# Altium PCB 最小系统板第二版.PcbDoc
Units mil, origin at the board's own origin, x right, y up, seen from the top; angles counter-clockwise.
Board outline 2086.61 x 984.25 mil, 2 copper layers (Top Layer, Bottom Layer); 32 components, 50 nets, 160 pads, 42 vias.
Unrouted connection lines stored in the file: 32.
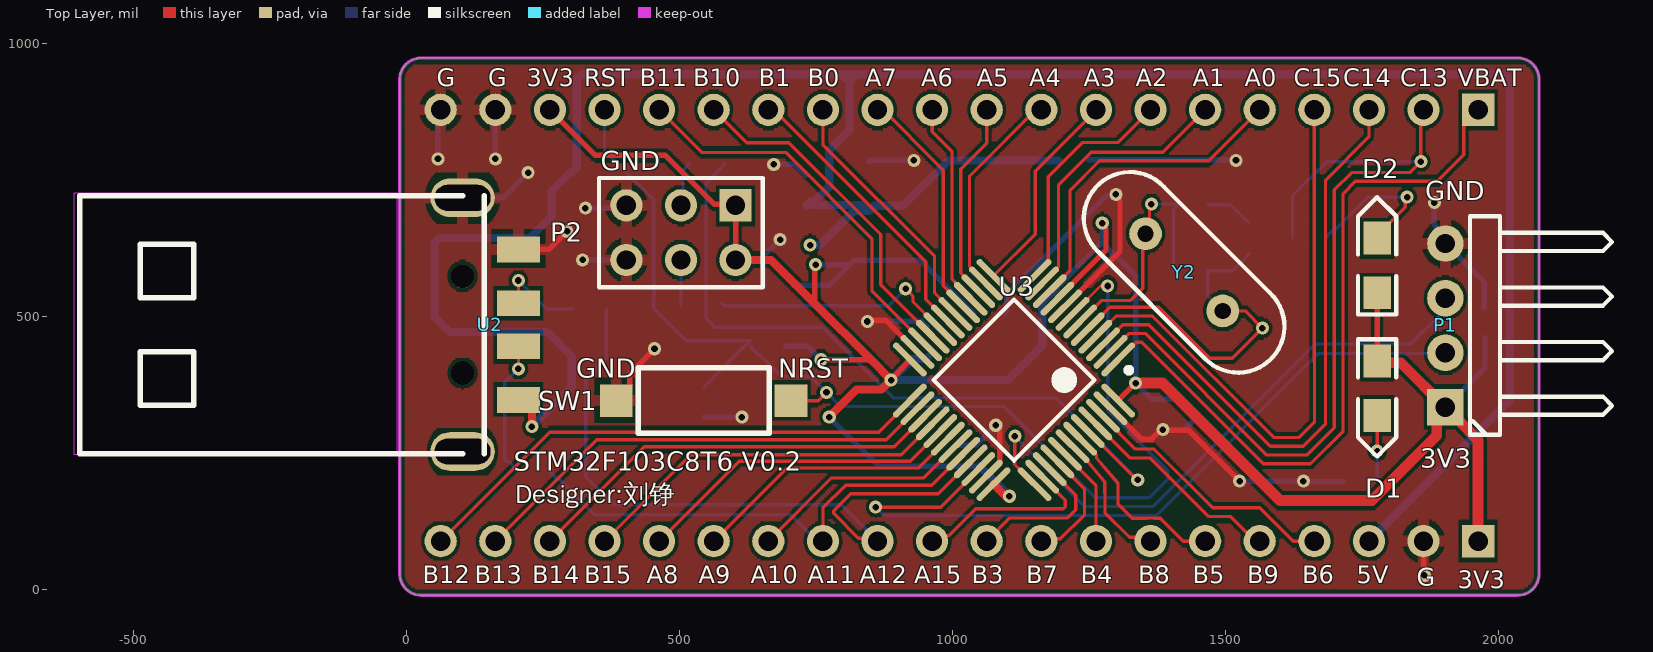
[diagram p0: Top Layer view]
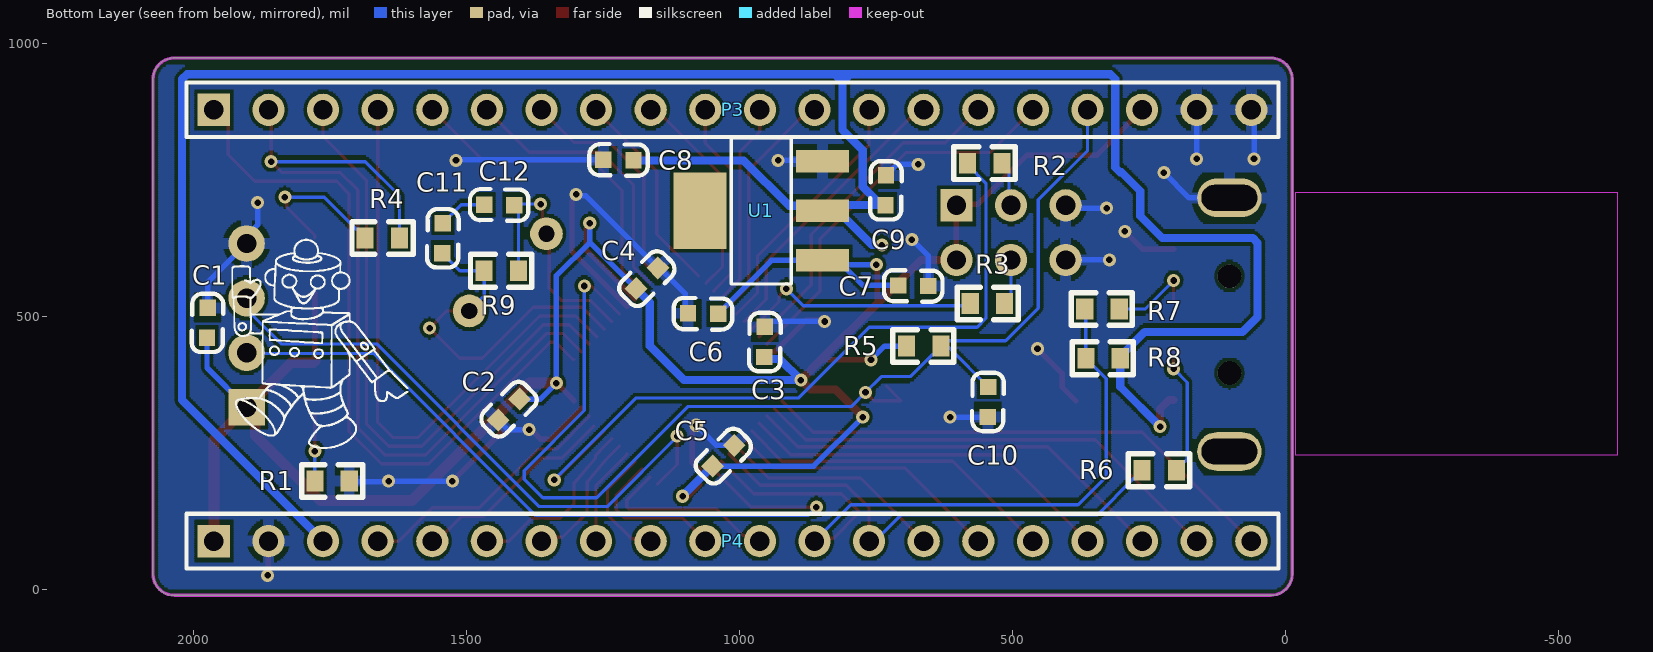
[diagram p1: Bottom Layer view, seen from below]

## Layer stack, top to bottom
Top Solder: solder mask 0.4, Solder Resist, Dk 3.5
Top Layer: signal copper 1.4
Dielectric 1: dielectric 12.6, FR-4, Dk 4.8
Bottom Layer: signal copper 1.4
Bottom Solder: solder mask 0.4, Solder Resist, Dk 3.5

## Board outline
-11.53,27.84 -11.53,933.35 cw(c27.84,933.35) 27.84,972.72 2035.71,972.72 cw(c2035.71,933.35) 2075.08,933.35 2075.08,27.84 cw(c2035.71,27.84) 2035.71,-11.53 27.84,-11.53 cw(c27.84,27.84)

## Design rules (kind name [scope] priority, off if disabled: settings)
Clearance [All] p1: gap=6 ignorepadtopadclearanceinfootprint=TRUE
PolygonConnect [All] p1: thpad.connectstyle=Relief thpad.reliefconductorwidth=20 thpad.reliefentries=4 thpad.polygonreliefangle="90 Angle" thpad.airgapwidth=10 smdpad.connectstyle=Relief smdpad.reliefconductorwidth=20 smdpad.reliefentries=4 smdpad.polygonreliefangle="90 Angle" smdpad.airgapwidth=10 via.connectstyle=Direct via.reliefconductorwidth=10 via.reliefentries=4 via.polygonreliefangle="90 Angle" via.airgapwidth=10
RoutingVias [All] p1: holewidth=28 width=50 viastyle="Through Hole" minholewidth=28 minwidth=50 maxholewidth=28 maxwidth=50
SolderMaskExpansion [All] p1: expansion=4 istentingtop=FALSE
Width Width_1 [InNetClass('New Class')] p1: maxlimit=20 minlimit=10 preferedwidth=15
Width [All] p2: maxlimit=6 minlimit=6 preferedwidth=6
30 further rules are at their usual default settings.

## Classes and differential pairs
net class "New Class": 5V GND VCC3V3
component class 最小系统板第二版: C1 C2 C3 C4 C5 C6 C8 C9 C10 C11 C12 D1 D2 m P1 P2 P3 P4 R1 R2 R3 R4 R5 R6 R7 R8 R9 SW1 U2 U3

## Components (designator, comment, footprint, x,y, rotation, side; value= is the part's Value field where it differs from the comment)
C1 "104,0603" 0603C 1976.35,459.79 r90 bottom
C2 "104,0603" 0603C 1403.07,347.62 r315 bottom
C3 "104,0603" 0603C 955.73,424.79 r90 bottom
C4 "104,0603" 0603C 1190.4,550.1 r135 bottom
C5 "104,0603" 0603C 1050.4,225.1 r135 bottom
C6 "104" 0603C 1095.21,505.35 r180 bottom
C7 "104" 0603C 710.21,556.35 r180 bottom
C8 "104" 0603C 1194.79,784.65 r0 bottom
C9 "104" 0603C 733.82,702.51 r90 bottom
C10 "105,0603" 0603C 544.65,370.21 r270 bottom
C11 "20p,0603" 0603C 1545.35,614.79 r90 bottom
C12 "20p,0603" 0603C 1413.32,702.37 r0 bottom
D1 "LED" LED-0805B 1778.47,417.72 r270 top
D2 "LED" LED-0805B 1778.47,542.72 r90 top
P1 "SWD" HDR2.54-WI-4P 1903.47,482.72 r90 top
P2 "Header 3X2" "Pin HDR2X3/2.54mm-S" 603.47,702.72 r180 top
P3 "Header20" "Pin HDR1X20/2.54mm-S" 1963.47,877.72 r180 bottom
P4 "Header20" "Pin HDR1X20/2.54mm-S" 1963.47,87.72 r180 bottom
R1 "510R,0603" 0603R 1715.48,197.72 r0 bottom
R2 "100K,0603" 0603R 582.99,780 r180 bottom
R3 "100K,0603" 0603R 515.25,523.06 r0 bottom
R4 "510R,0603" 0603R 1623.47,642.72 r0 bottom
R5 "10K" 0603R 695,445 r180 bottom
R6 "10K" 0603R 263.47,217.72 r180 bottom
R7 "10K" 0603R 368.47,512.72 r180 bottom
R8 "10K" 0603R 366.46,422.72 r180 bottom
R9 "1M" 0603R 1468.47,582.72 r180 bottom
SW1 "KEY" 复位开关 525,335 r180 top
U1 "AMS1117" SOT-223_L6.5-W3.5-P2.30-LS7.0-BR 960.97,692.72 r180 bottom
U2 "USB-mrico" "PCBComponent_1 - duplicate" 87.64,612.6 r270 top
U3 "STM32F103C8T6" LQFP-48_M 1113.47,382.72 r225 top
Y2 "8MHz" 直插外部晶振 1425,580 r135 top

## Footprints (in the part's own frame and the unit in brackets; to place one, negate y for a bottom-side part, rotate by r counter-clockwise, add the part's x,y. Pads: shape width x height; smd on the part's side, far side on the other; paste and mask are expansions set on the pad)
0603C [mil]
  rect 30x30 smd: 1(0.21,-0.35) 2(55.21,-1.35)
  silkscreen extent -26,-30 81,28, body extent -1,-15 62,16, height 12
0603R [mm]
  rect 0.8x0.965 smd: 1(0,0) 2(1.6,0)
  silkscreen extent -0.64,-0.76 2.21,0.76, body extent -0.04,-0.41 1.56,0.41, height 0.45
HDR2.54-WI-4P [mm] "弯脚排针，4脚"
  rect 1.7x1.7 hole 0.9: 1(-3.81,0)
  round 1.7 hole 0.9: 2(-1.27,0) 3(1.27,0) 4(3.81,0)
  silkscreen extent -5.08,-7.76 5.08,-1.14, body extent -5.08,-7.77 5.08,1.27, height 4.85
LED-0805B [mil]
  rect 60x50 smd: A(0,0) K(100,0)
  silkscreen extent -40,-35 175,35, body extent 10,-25 89,25, height 32
LQFP-48_M [mm] "Thin QFP, 48-Leads, Body 7x7mm, Pitch 0.5mm, IPC Low Density"
  oval 2.1x0.3 smd: 1(-4.1,2.75) 2(-4.1,2.25) 3(-4.1,1.75) 4(-4.1,1.25) 5(-4.1,0.75) 6(-4.1,0.25) 7(-4.1,-0.25) 8(-4.1,-0.75) 9(-4.1,-1.25) 10(-4.1,-1.75) 11(-4.1,-2.25) 12(-4.1,-2.75) 25(4.1,-2.75) 26(4.1,-2.25) 27(4.1,-1.75) 28(4.1,-1.25) 29(4.1,-0.75) 30(4.1,-0.25) 31(4.1,0.25) 32(4.1,0.75) 33(4.1,1.25) 34(4.1,1.75) 35(4.1,2.25) 36(4.1,2.75)
  oval 0.3x2.1 smd: 13(-2.75,-4.1) 14(-2.25,-4.1) 15(-1.75,-4.1) 16(-1.25,-4.1) 17(-0.75,-4.1) 18(-0.25,-4.1) 19(0.25,-4.1) 20(0.75,-4.1) 21(1.25,-4.1) 22(1.75,-4.1) 23(2.25,-4.1) 24(2.75,-4.1) 37(2.75,4.1) 38(2.25,4.1) 39(1.75,4.1) 40(1.25,4.1) 41(0.75,4.1) 42(0.25,4.1) 43(-0.25,4.1) 44(-0.75,4.1) 45(-1.25,4.1) 46(-1.75,4.1) 47(-2.25,4.1) 48(-2.75,4.1)
  silkscreen extent -4.22,-2.65 2.65,3.57, body extent -3.5,-3.5 3.5,3.5, height 1.6
"PCBComponent_1 - duplicate" [mm]
  rect 1.2x2 smd: 1(6.763,3.002) 2(4.263,3.002) 3(2.263,3.002) 4(-0.237,3.002)
  oval 1.8x3 hole 1.2 slot 2.6 at 90 deg: 5(-2.637,0.402) 6(9.163,0.402)
  round 1.1 hole 1.1 unplated: ""(1.013,0.402) ""(5.513,0.402)
  Keep-Out Layer board cut-out: -2.884,-2.667 9.308,-2.667 9.308,-17.653 -2.884,-17.653
  silkscreen extent -2.74,-17.4 9.26,1.4
"Pin HDR1X20/2.54mm-S" [mm]
  rect 1.5x1.5 hole 0.9: 1(0,0)
  round 1.5 hole 0.9: 2(2.54,0) 3(5.08,0) 4(7.62,0) 5(10.16,0) 6(12.7,0) 7(15.24,0) 8(17.78,0) 9(20.32,0) 10(22.86,0) 11(25.4,0) 12(27.94,0) 13(30.48,0) 14(33.02,0) 15(35.56,0) 16(38.1,0) 17(40.64,0) 18(43.18,0) 19(45.72,0) 20(48.26,0)
  silkscreen extent -1.27,-1.27 49.53,1.27, body extent -1.27,-1.27 49.53,1.27, height 7.58
"Pin HDR2X3/2.54mm-S" [mm] "Connector; Header; 3x2 Position"
  rect 1.5x1.5 hole 0.9: 1(0,0)
  round 1.5 hole 0.9: 2(0,2.54) 3(2.54,0) 4(2.54,2.54) 5(5.08,0) 6(5.08,2.54)
  silkscreen extent -1.27,-1.27 6.35,3.81, body extent -1.27,-1.27 6.35,3.81, height 7.58
SOT-223_L6.5-W3.5-P2.30-LS7.0-BR [mm]
  rect 2.465x1.05 smd: 1(2.857,-2.3) 2(2.857,0) 3(2.858,2.3)
  rect 2.465x3.54 smd: 4(-2.857,0)
  silkscreen extent -1.4,-3.4 1.4,3.4
复位开关 [mil]
  rect 60x60 smd: 1(-180,-10) 2(140,-10)
  silkscreen extent -140,-70 100,50
直插外部晶振 [mil]
  round 60 hole 30: 1(-100,0) 2(100,0)
  silkscreen extent -225,-85 225,85

## Part data
C1 C2 C3 C4 C5 C6 C7 C8 C9 C10 C11 C12: library part CAP, "电容"
D1 D2: "LED灯"
R1 R2 R3 R4 R5 R6 R7 R8 R9: library part RES, "电阻"
SW1: library part RST, "按键"
U1: library part "AMS1117 3V3"
U3: library part MCU
Y2: library part "Crystal oscillator", "晶振"

## Via types
v1: diameter 24, hole 12, Top Layer to Bottom Layer, tented both sides, 42 vias

## Nets (pads, with @x,y where several pads share a name; then routed paths per layer and width w, separated by ;. In a path a pad name is that pad's centre, name@x,y a point inside that pad or via, vN(x,y) a via of type N, cw(c..) or ccw(c..) an arc to the next point about the centre after c; other vN are vias at no path point)
5V: C8.1 C9.1 P4.3 R8.2 U1.2 U2.1 | length 4706.1
  Top Layer w15: U2.1 214.45,346.33 230.58,330.21 v1(230.58,297.54)
  Bottom Layer w15: v1(230.58,297.54) 303.47,370.43 303.47,425.97 258.73,470.71 79.29,470.71 51.87,498.13 51.87,634.09 60.66,642.88 226.54,642.88 266.83,683.17 266.83,729.19 300.91,763.27 303.85,763.27 312.64,772.05 312.64,933.93 321.43,942.72 802.2,942.72 2012.9,942.72 2021.69,933.93 2021.69,345.94 P4.3 ; C9.1 C9.1@740.97,710.22 ; v1(740,630) 757.89,630 820.61,692.72 U1.2 ; C9.1@740.97,703.45 747.99,703.45 837.74,703.45 U1.2 ; C9.1@747.99,710.22 775.21,737.44 775.21,803.96 812.1,840.85 812.1,932.82 ; U1.2@856.38,700.64 U1.2 ; U1.2@857.07,702.03 910.17,702.03 993.14,785 C8.1
BOOT0: R2.1 U3.44 | length 1340
  Top Layer w6: U3.44 1290.38,247.57 ; 1290.38,247.54 1337.92,200 v1(1340,200)
  Bottom Layer w6: R2.1 582.99,776.75 549.38,743.14 549.38,495.62 565.68,479.32 763.06,479.32 892.38,350 1190,350 v1(1340,200)
BOOT1: R3.2 U3.20 | length 437.7
  Top Layer w6: 925,540 928.44,536.56 928.44,525.99 U3.20
  Bottom Layer w6: R3.2 582.58,518.72 883.72,518.72 v1(915,550)
GND: C1.2 C2.2 C3.2 C4.2 C5.2 C6.1 C7.2 C8.2 C9.2 C10.2 P1.4 P2.5 P2.6 P3.19 P3.20 P4.2 R1.1 SW1.2 U1.3 U2.4 U2.5 U3.8 U3.23 U3.35 U3.47 | length 3127.5
  Top Layer w10: U2.4 261.94,621.94 v1(295,655) ; SW1.2 410,370 410,395 v1(455,440) ; v1(845,490) 847.45,492.45 878.47,492.45 U3.23 ; U3.35 1087.02,231 1087.02,292.98 v1(1080,300) ; U3.8 1307.57,618.58 1307.57,711.36 1300,718.93 v1(1300,722.72) ; U3.47 1347.03,274.43 1365.38,274.43 1382.82,291.88 v1(1386.12,291.88) 1387.2,290.8 1433.43,290.8 v1(1526.51,197.72) ; P4.2 1864.23,86.96 1864.23,25.77 v1(1865,25)
  Bottom Layer w10: v1(58.47,787.72) 58.47,872.72 P3.20 ; U2.5 177.17,716.42 v1(223.47,762.72) ; v1(163.47,787.72) P3.19 ; v1(323.47,602.72) P2.6 ; v1(328.47,697.72) 398.47,697.72 P2.5 ; C10.2 v1(615,315) ; C7.2 655,610 v1(685,640) ; v1(673.47,777.72) 712.47,777.72 C9.2 ; v1@845.23,489.77 v1(845,490) 944.37,490 C3.2 ; U1.3 850.2,785 v1(930,785) ; C5.2 1043.18,263.18 v1(1080,300) ; C6.1 1100.55,510.55 1100.55,541 1147.73,588.18 C4.2 1282.26,720.04 1297.32,720.04 v1(1300,722.72) ; C8.2 1519,786 v1(1520,785) ; v1(1386.12,291.88) 1425.41,291.88 C2.2 ; v1(1526.51,197.72) v1@1639.68,197.72 ; v1(1643.47,197.72) 1644.33,196.86 1714.62,196.86 R1.1 ; v1(1883.47,707.72) 1883.47,667.04 1903.47,647.04 P1.4 1975,561.19 C1.2
NetC11_2: C11.2 C12.2 | length 89.4
  Bottom Layer w6: C12.2 1510.28,703.72 C11.2
NetD1_K: D1.K R1.2 | length 120
  Top Layer w6: v1(1778.47,252.72) D1.K
  Bottom Layer w6: R1.2 v1(1778.47,252.72)
NetD2_K: D2.K R4.2 | length 277.8
  Top Layer w6: D2.K 1778.47,647.72 1830.02,699.28 1830.02,714.28 v1(1833.47,717.72)
  Bottom Layer w6: R4.2 1686.46,645.97 1699.21,658.72 1702.46,658.72 1761.46,717.72 v1(1833.47,717.72)
NetP2_3: P2.3 R2.2 | length 84.1
  Bottom Layer w6: P2.3 507.25,706.5 507.25,767.25 R2.2
NetP2_4: P2.4 R3.1 | length 85
  Bottom Layer w6: R3.1@503.47,517.72 P2.4
NetR6_2: R6.2 U2.2 | length 247.5
  Top Layer w6: v1(205.82,403.21) U2.2
  Bottom Layer w6: R6.2 200.48,220.97 187.73,233.72 184.48,233.72 180.82,237.38 180.82,378.21 v1(205.82,403.21)
NetR7_2: R7.2 U2.3 | length 162.9
  Top Layer w6: U2.3 v1(205.82,565.07)
  Bottom Layer w6: v1(205.82,565.07) 258.17,512.72 R7.2
NRST: C10.1 P3.17 R5.2 SW1.1 U3.7 | length 2211.2
  Top Layer w6: SW1.1@732,372 SW1.1 755,345 v1(770,360) ; U3.7 1271.83,555 v1(1285,555)
  Bottom Layer w6: P3.17 363.47,802.86 453.47,712.86 453.47,514.59 513.59,454.47 630.48,454.47 617.73,441.72 616.72,441.72 C10.1 ; R5.2 632.01,441.75 644.76,429 648,429 687.9,389.11 740.89,389.11 v1(770,360) 795.8,334.2 1095.5,334.2 1262.6,167.11 1360.86,167.11 1395,201.24 1395,216.95 1285,326.95 v1(1285,555)
OSCIN: C11.1 R9.1 U3.5 Y2.1 | length 661.4
  Top Layer w6: U3.5 1288.55,516.05 1378.81,516.05 1472.13,422.72 1513.47,422.72 v1(1568.47,477.72) 1536.9,509.29 Y2.1
  Bottom Layer w6: Y2.1@1490.71,504.29 1490.71,514.96 1468.47,537.2 R9.1 1512.72,582.72 C11.1
OSCOUT: C12.1 R9.2 U3.6 Y2.2 | length 473.4
  Top Layer w6: U3.6 1272.97,528.3 1326.68,528.3 1349.29,550.91 1349.29,645.71 Y2.2 1361.56,657.98 1361.56,701.56 v1(1365,705)
  Bottom Layer w6: v1(1365,705) 1411.25,705 C12.1 1405.48,694.67 R9.2
PA0: P3.5 U3.10 | length 607.7
  Top Layer w6: U3.10@1178.89,546.68 1216.14,583.93 1216.14,730.76 1270,784.62 1470.36,784.62 P3.5
PA1: P3.6 U3.11 | length 517.3
  Top Layer w6: U3.11@1164.97,560.6 1195.01,590.64 1195.01,740 1254.92,799.91 1385.66,799.91 P3.6
PA2: P3.7 U3.12 | length 430.3
  Top Layer w6: U3.12 1176.11,598.47 1176.11,755.3 1238.39,817.58 1303.33,817.58 P3.7
PA3: P3.8 U3.13 | length 382
  Top Layer w6: U3.13 1152.58,650.11 1152.58,765.29 1263.47,876.18 P3.8
PA4: P3.9 U3.14 | length 395.2
  Top Layer w6: U3.14 1061.97,560.6 1031.93,590.64 1031.93,756.18 P3.9@1163.47,887.72
PA5: P3.10 U3.15 | length 375.1
  Top Layer w6: U3.15 1048.05,546.68 1015.93,578.8 1015.93,769.16 1063.47,816.7 P3.10@1063.47,887.72
PA6: P3.11 U3.16 | length 385.3
  Top Layer w6: P3.11@963.47,887.72 963.47,837.63 999.93,801.17 999.93,566.96 1034.13,532.76 U3.16
PA7: P3.12 U3.17 | length 434.9
  Top Layer w6: P3.12@863.47,887.72 983.93,767.26 983.93,555.12 1020.21,518.84 U3.17
PA8: P4.16 U3.29 | length 598.5
  Top Layer w6: P4.16 609.94,234.19 923.18,234.19 U3.29
PA9: P4.15 U3.30 | length 506.7
  Top Layer w6: P4.15 697.27,221.52 938.35,221.52 U3.30
PA10: P4.14 U3.31 | length 414.9
  Top Layer w6: P4.14 779.17,203.43 948.09,203.43 U3.31
PA11: P4.13 R6.1 U3.32 | length 914.5
  Top Layer w6: P4.13 763.47,148.7 805,190.24 962.75,190.24 U3.32
  Bottom Layer w6: R6.1 263.47,214.47 276.22,201.72 279.46,201.72 345.02,136.17 704.41,136.17 752.86,87.72 P4.13
PA12: P4.12 R7.1 R8.1 U3.33 | length 1301.1
  Top Layer w6: P4.12 858.1,93.09 828.46,93.09 783.1,138.44 783.1,143.41 814.25,174.56 974.9,174.56 U3.33
  Bottom Layer w6: R7.1 366.46,510.71 R8.1 329.17,385.43 329.17,206.01 380.66,154.52 796.67,154.52 P4.12
PA15: P4.11 U3.38 | length 341.3
  Top Layer w6: P4.11 973.62,97.87 993.9,97.87 1043.19,147.16 1203.55,147.16 1207.07,150.67 1207.07,162.74 U3.38@1164.97,204.84
PB0: P3.13 U3.18 | length 484.5
  Top Layer w6: P3.13@763.47,887.72 763.47,813.74 967.93,609.28 967.93,542.18 U3.18
PB1: P3.14 U3.19 | length 534.1
  Top Layer w6: P3.14@663.47,887.72 951.93,599.26 951.93,530.34 U3.19
PB3: P4.10 U3.39 | length 281.3
  Top Layer w6: P4.10 1106,130.25 1211.46,130.25 1226.61,145.4 1226.61,172.15 U3.39
PB4: P4.9 U3.40 | length 217.5
  Top Layer w6: P4.9 1167.71,91.96 1198.48,91.96 1242.61,136.09 1242.61,182.88 1192.81,232.68 U3.40
PB5: P4.8 U3.41 | length 183.5
  Top Layer w6: U3.41 1206.73,246.6 1263.47,189.86 P4.8
PB6: P4.7 U3.42 | length 249.5
  Top Layer w6: U3.42 1245.55,236.72 1278.09,198.13 1279.47,196.49 1279.56,190.43 1280,160 1280,140 1324.94,95.06 1356.13,95.06 P4.7
PB7: P4.6 U3.43 | length 334.6
  Top Layer w6: U3.43 1255.22,254.89 1256.67,253.44 1256.76,252.25 1264.61,244.4 1264.61,239.15 1303.83,193.67 1303.83,155.83 1330,129.66 1356.43,129.66 cw(c1363.47,87.72) 1370.5,129.66 1381.67,129.66 1393.54,117.79 1423.61,87.72 P4.6
PB8: P4.5 U3.45 | length 382.7
  Top Layer w6: U3.45@1267.86,297.93 1325.99,239.8 1363.33,239.8 1470.43,132.69 1510.25,132.69 1555.22,87.72 P4.5
PB9: P4.4 U3.46 | length 483.5
  Top Layer w6: U3.46 1276.33,316.2 1306.37,286.16 1306.37,285.09 1334.84,256.62 1334.96,256.49 1335.01,256.43 1369.32,256.43 1477.06,148.69 1563.72,148.69 1624.69,87.72 P4.4
PB10: P3.15 U3.21 | length 627.1
  Top Layer w6: P3.15 624.01,817.18 701.31,817.18 869.22,649.27 869.22,557.37 U3.21
PB11: P3.16 U3.22 | length 721.5
  Top Layer w6: P3.16 541.59,799.6 695.42,799.6 853.22,641.8 853.22,546.07 950.61,448.68 U3.22
PB12: P4.20 U3.25 | length 966.6
  Top Layer w6: P4.20 263.06,287.31 866.04,287.31 922.77,344.04 U3.25
PB13: P4.19 U3.26 | length 874.7
  Top Layer w6: P4.19 349,273.25 879.83,273.25 936.69,330.12 U3.26
PB14: P4.18 U3.27 | length 782.2
  Top Layer w6: P4.18 436.31,260.56 893.88,260.56 U3.27
PB15: P4.17 U3.28 | length 690.4
  Top Layer w6: P4.17 521.58,245.83 906.98,245.83 U3.28
PC13: P3.2 R4.1 U3.2 | length 1587.6
  Top Layer w6: U3.2 1324.07,468.05 1353.7,468.05 1576.4,245.35 1649.78,245.35 1700.1,295.67 1700.1,730.97 1731.84,762.71 1838.45,762.71 v1(1858.47,782.72) 1858.47,872.72 P3.2
  Bottom Layer w6: R4.1 1623.47,720.38 1685.81,782.72 v1(1858.47,782.72)
PC14: P3.3 U3.3 | length 1140.1
  Top Layer w6: U3.3 1312.23,484.05 1360.33,484.05 1583.02,261.35 1643.15,261.35 1684.1,302.3 1684.1,748.58 1763.47,827.95 P3.3
PC15: P3.4 U3.4 | length 1093
  Top Layer w6: U3.4 1300.39,500.05 1366.95,500.05 1589.65,277.35 1635.24,277.35 1663.58,305.69 1663.58,416.12 1663.47,416.22 P3.4
SWCLK: P1.3 U3.37 | length 1116.2
  Top Layer w6: v1(1115,280) 1115,228.08 U3.37 U3.37@1151.05,193.13
  Bottom Layer w6: v1(1115,280) 1115,279.35 1243.24,151.11 1367.48,151.11 1665.33,448.95 1839.97,448.95 1891.81,500.8 1891.81,521.06 P1.3
SWIO: P1.2 U3.34 | length 1391
  Top Layer w6: v1(860,150) 930,150 979.29,150 1048.05,218.76 U3.34
  Bottom Layer w6: v1(860,150) 875.43,134.57 1373.58,134.57 1670.4,431.4 1902.15,431.4 P1.2
VBAT: P3.1 U3.1 | length 1321.1
  Top Layer w6: U3.1 1305.74,420.3 1337.43,451.99 1347.13,451.99 1569.77,229.35 1656.41,229.35 1716.1,289.04 1716.1,724.34 1738.46,746.71 1888.67,746.71 1936.94,794.98 1936.94,851.19 P3.1
VCC3V3: C1.1 C2.1 C3.1 C4.1 C5.1 C6.2 C7.1 D1.A D2.A P1.1 P2.1 P2.2 P3.18 P4.1 R5.1 U1.1 U3.9 U3.24 U3.36 U3.48 | length 4891.3
  Top Layer w10: P3.18 346.44,794.75 474.41,794.75 564.8,704.36 601.83,704.36 P2.1 P2.2 ; 748.09,523.09 748.09,592.3 v1(750,594.2) ; v1(760,420) 851.19,420 ; v1(888.47,382.72) U3.24 ; U3.9 1281.9,620.75 1281.9,659.31 ; U3.48 v1(1336.13,377.1) ; D1.A D2.A
  Top Layer w15: P2.2 668.47,602.72 748.09,523.09 851.19,420 v1(888.47,382.72) 870.92,365.17 825.17,365.17 805,345 v1(775,315) ; U3.36 1096.19,171.72 1103.28,171.72 v1(1105,170)
  Top Layer w20: v1(1336.13,377.1) 1385.1,377.1 1600.38,161.83 1768.56,161.83 1887.7,280.97 1887.7,316.95 P1.1 ; D1.A 1781.75,414.44 1821.75,414.44 P1.1 ; P4.1 1963.47,272.72 1926.93,309.26 P1.1
  Bottom Layer w10: R5.1 735,445 v1(760,420) ; C7.1 774.44,556 U1.1@812.65,594.2 ; v1(750,594.2) U1.1@812.65,594.2 ; v1(775,315) 865,225 C5.1 ; C6.2 942.83,601.17 942.83,602.17 U1.1 820.61,602.17 U1.1@812.65,594.2 ; C4.1 1275,635 ; v1(1275,670) 1275,635 ; C2.1 1365.51,347.72 v1(1336.13,377.1) 1336.13,573.87 1275,635 ; P1.1 1976,405.25 C1.1
  Bottom Layer w15: C3.1 951.78,421.4 927.15,421.4 v1(888.47,382.72) 1102.72,382.72 1165,445 1165,525 C4.1 ; C5.1 v1(1105,170)
pads on no net: U1.4 U2. U2.6

## Polygon pours and split planes (outlines as drawn)
GND on Top Layer "GND_L01_P000" (hatched Horizontal grid 4 track 5, remove dead copper, pour order 0): -11.53,27.84 ccw(c27.84,27.84) 27.84,-11.53 2035.71,-11.53 ccw(c2035.71,27.84) 2075.08,27.84 2075.08,933.35 ccw(c2035.71,933.35) 2035.71,972.72 27.84,972.72 ccw(c27.84,933.35) -11.53,933.35
GND on Bottom Layer "GND_L02_P002" (hatched Horizontal grid 4 track 5, remove dead copper, pour order 2): -10.08,27.84 ccw(c29.29,27.84) 29.29,-11.53 2037.16,-11.53 ccw(c2037.16,27.84) 2076.53,27.84 2076.53,933.35 ccw(c2037.16,933.35) 2037.16,972.72 29.29,972.72 ccw(c29.29,933.35) -10.08,933.35

## Keep-outs
Keep-Out Layer:
  the board outline again, w5.98

## Other copper
Bottom Layer:
  region net 5V: 805,925 812.07,932.07 797.93,946.21 790.86,939.14
  region net 5V: 830,935 822.93,942.07 808.79,927.93 815.86,920.86

## Silkscreen, mask and mechanical layers (free items; w line width, h text height)
Top Overlay:
  text "G" at 56,921 h32
  text "G" at 151,921 h32
  text "3V3" at 221,921 h32
  text "RST" at 326,921 h32
  text "B11" at 428.36,921 h32
  text "B10" at 526,921 h32
  text "B1" at 646,921 h32
  text "B0" at 736,921 h32
  text "A7" at 841,921 h32
  text "A6" at 943.24,921 h32
  text "A5" at 1045.48,921 h32
  text "A4" at 1141,921 h32
  text "A3" at 1241,921 h32
  text "A2" at 1336,921 h32
  text "A1" at 1441,921 h32
  text "A0" at 1536,921 h32
  text "C15" at 1626,921 h32
  text "C14" at 1716,921 h32
  text "C13" at 1821,921 h32
  text "VBAT" at 1926,921 h32
  text "GND" at 357,767 h35
  text "GND" at 1867,712 h35
  text "GND" at 312,387 h35
  text "NRST" at 682,387 h35
  text "3V3" at 1857,222 h35
  text "STM32F103C8T6 V0.2" at 197,217 h35
  text "Designer:刘铮" at 200,145 h60
  text "B12" at 31,11 h32
  text "B13" at 126,11 h32
  text "B14" at 231,11 h32
  text "B15" at 326,11 h32
  text "A8" at 441,11 h32
  text "A9" at 536,11 h32
  text "A10" at 631,11 h32
  text "A11" at 736,11 h32
  text "A12" at 831,11 h32
  text "A15" at 931,11 h32
  text "B3" at 1036,11 h32
  text "B7" at 1136,11 h32
  text "B4" at 1236,11 h32
  text "B8" at 1341,11 h32
  text "B5" at 1441,11 h32
  text "B9" at 1541,11 h32
  text "B6" at 1641,11 h32
  text "5V" at 1741,11 h32
  text "G" at 1851,6 h32
  text "3V3" at 1926,1 h32
Bottom Overlay:
  drawing of 4211 lines, arcs and shapes, not listed
Mechanical 1:
  the board outline again, w5.98